# Altium PCB PCB1.PcbDoc
Units mm, origin at the board's own origin, x right, y up, seen from the top; angles counter-clockwise.
Board outline 40 x 40 mm, 2 copper layers (Top Layer, Bottom Layer); 43 components, 46 nets, 188 pads, 26 vias.
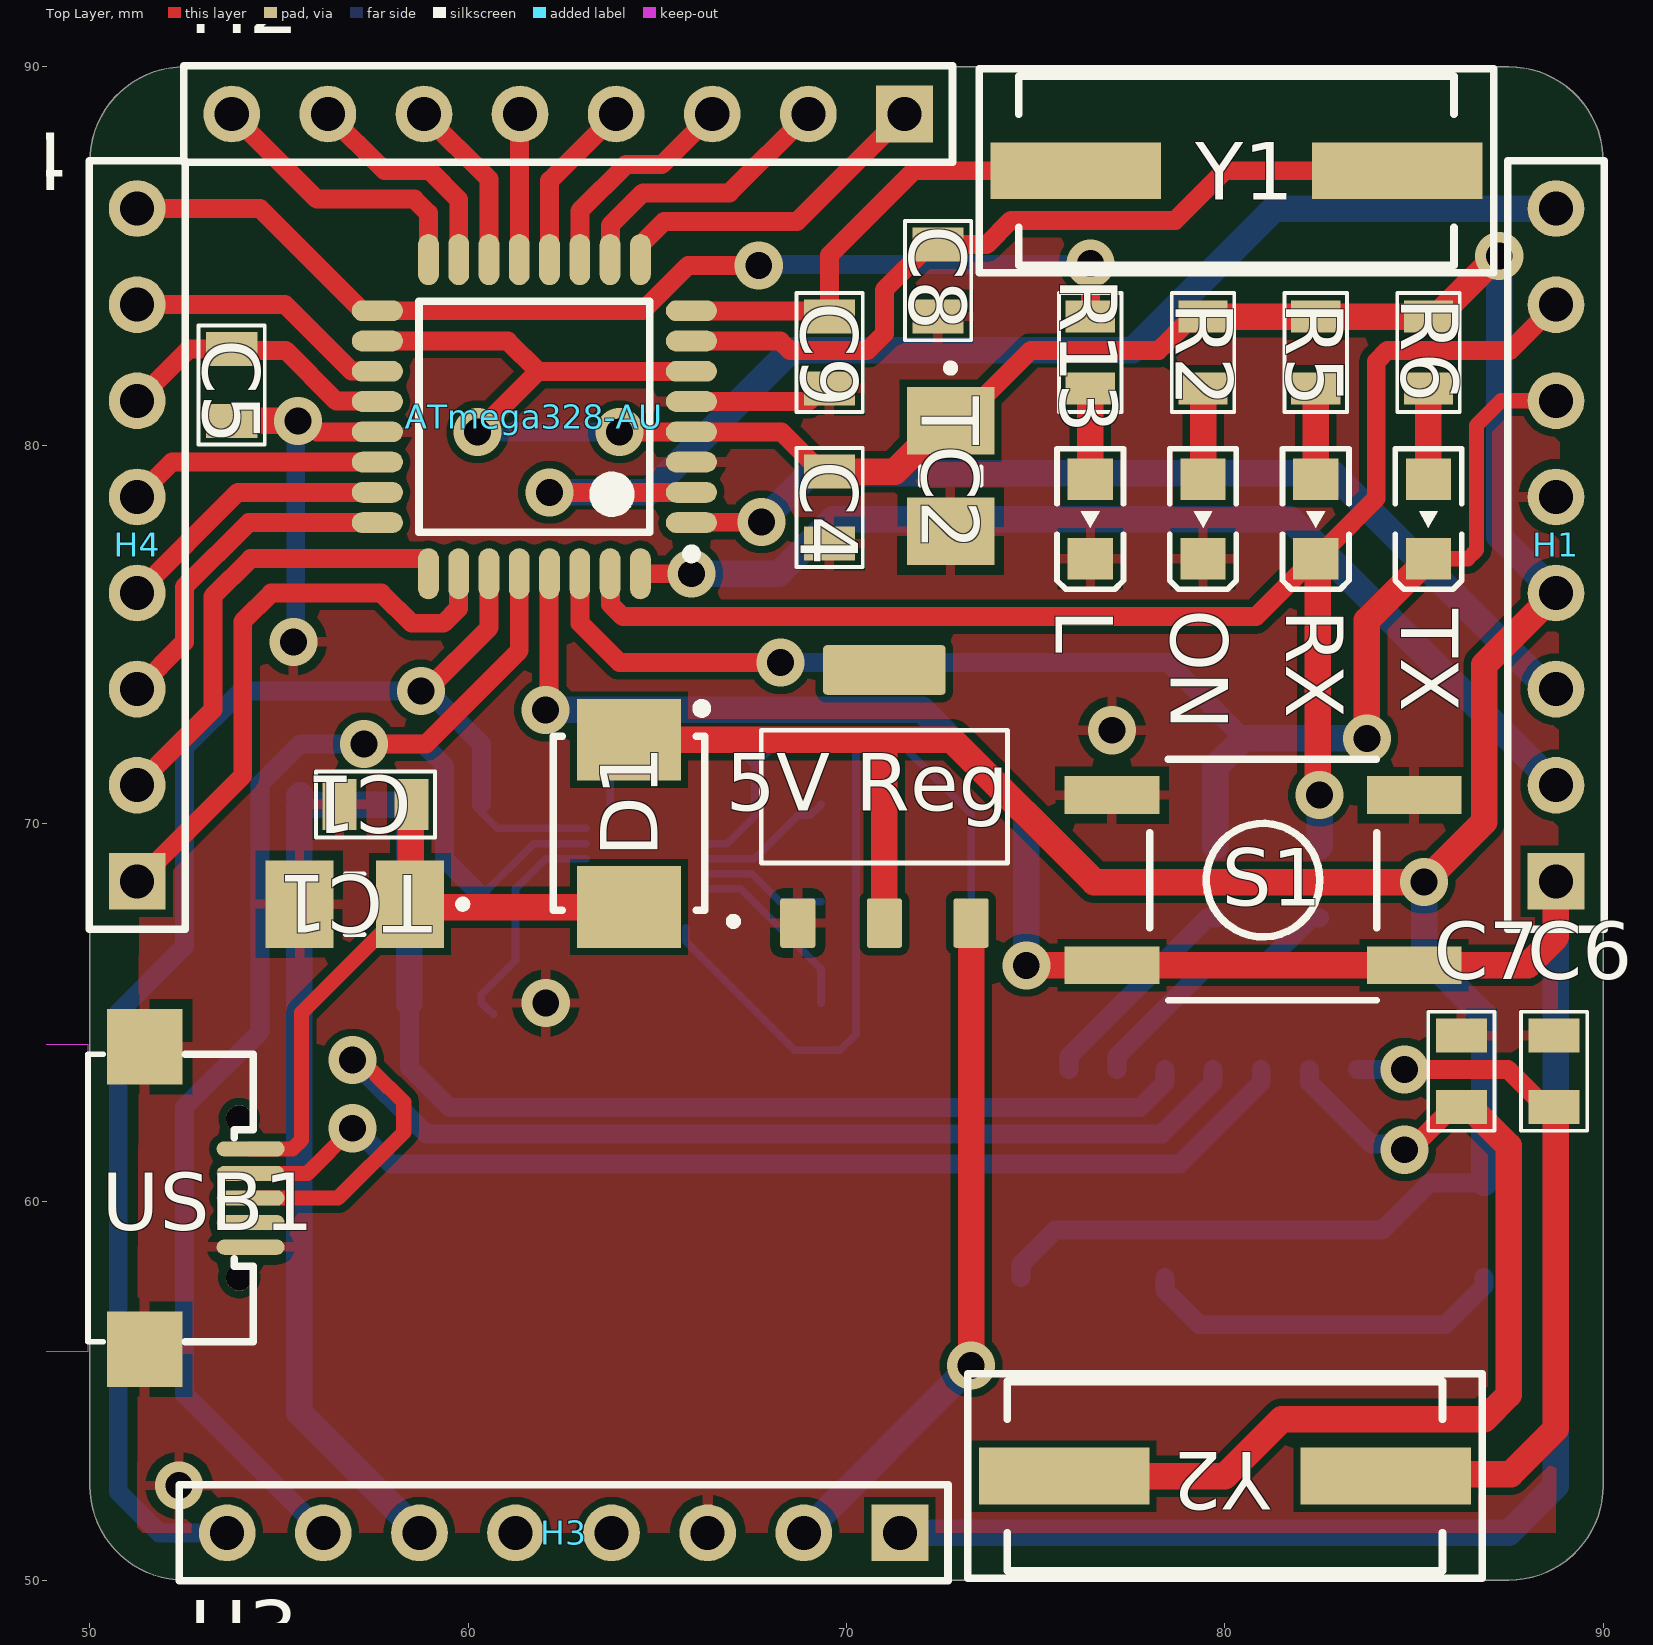
[diagram p0: Top Layer view]
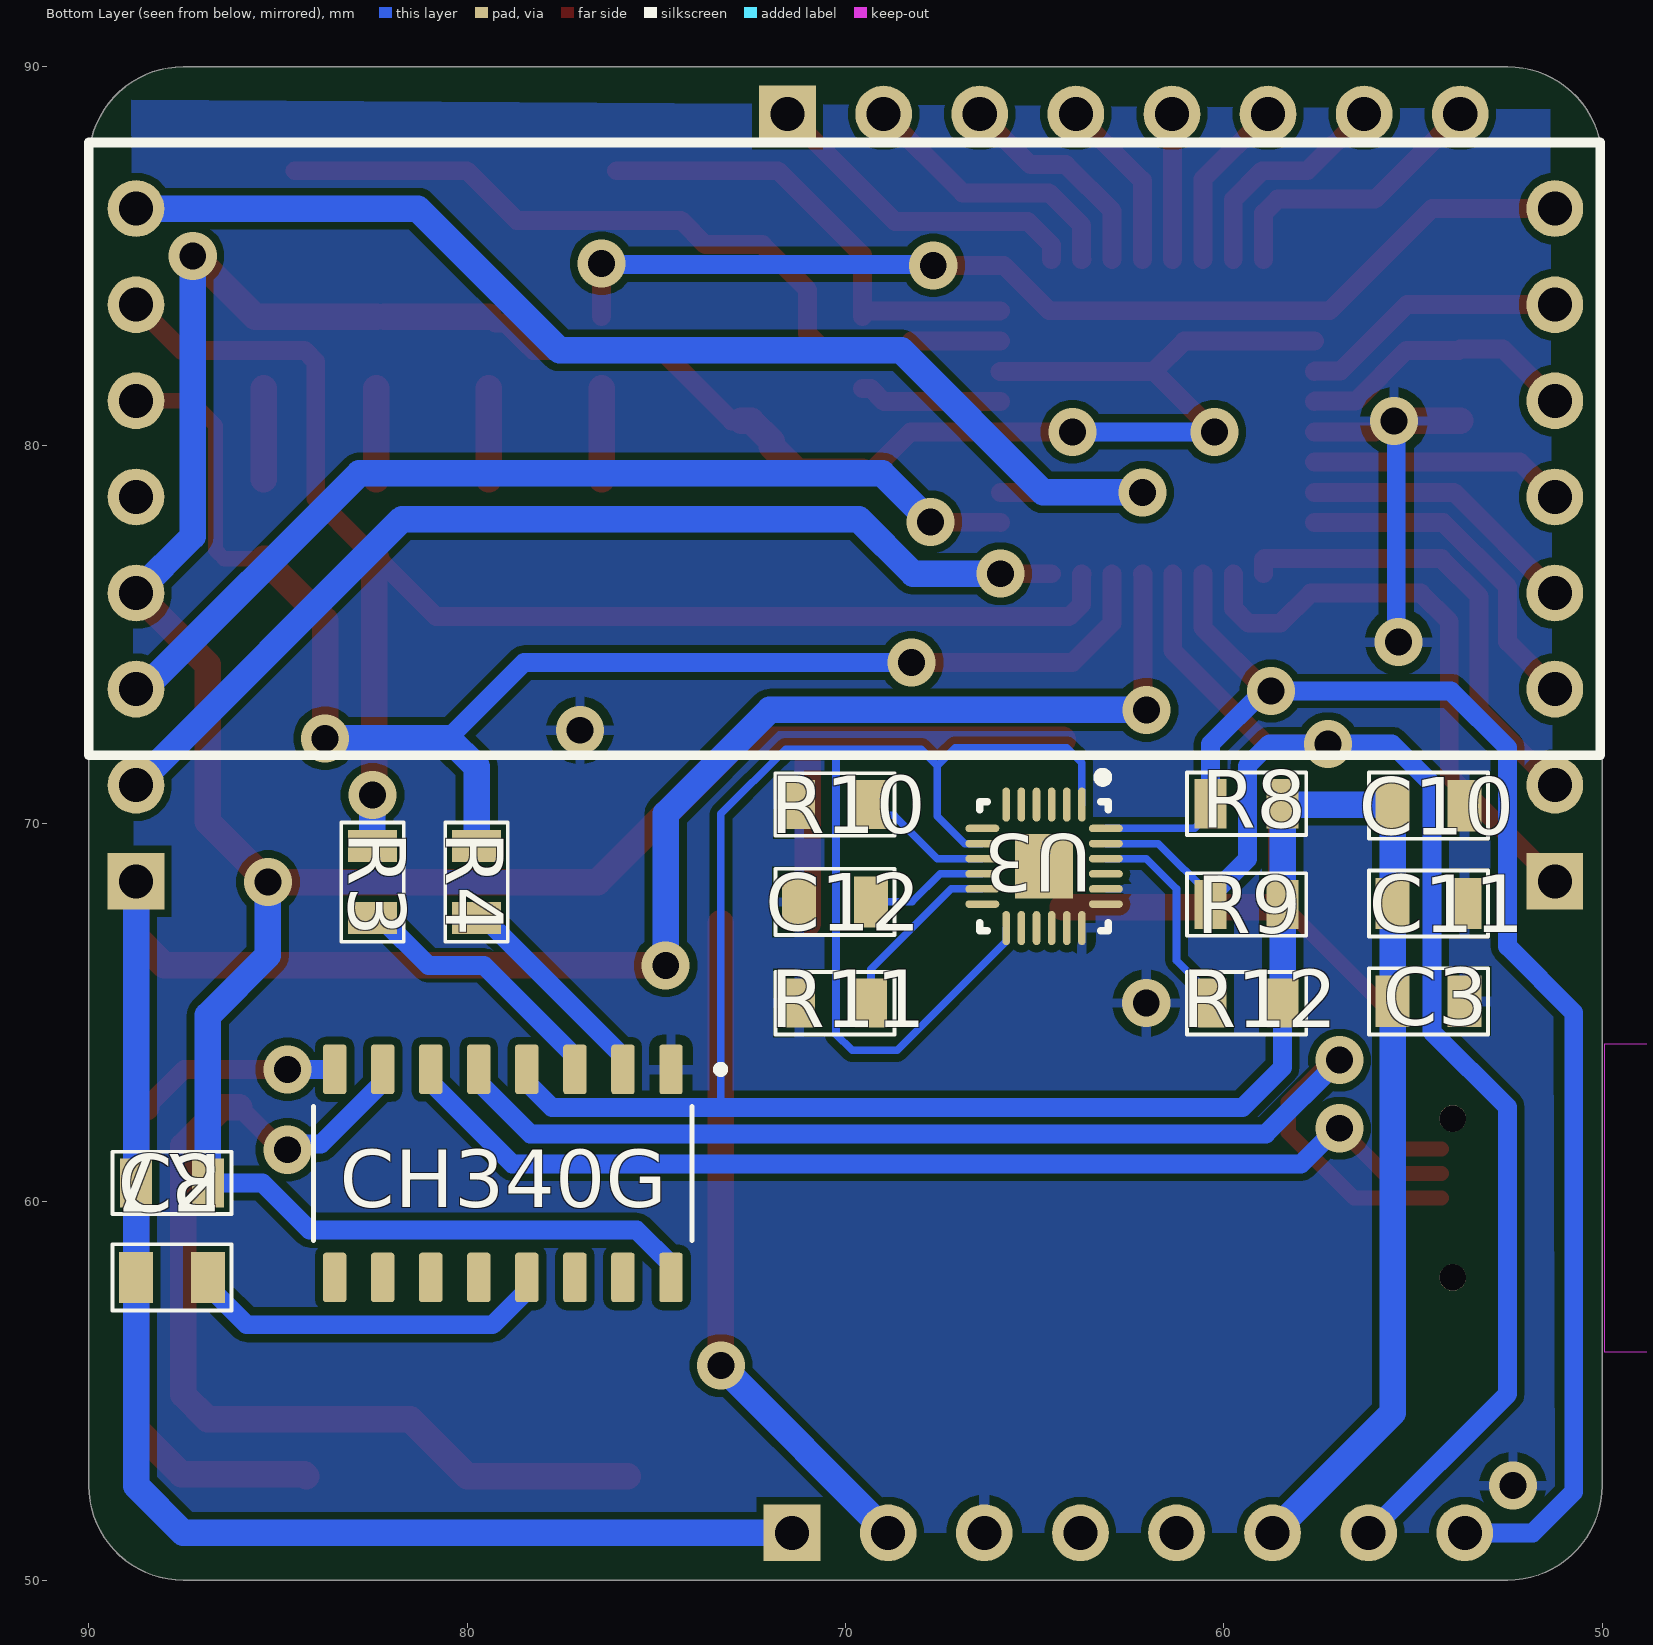
[diagram p1: Bottom Layer view, seen from below]
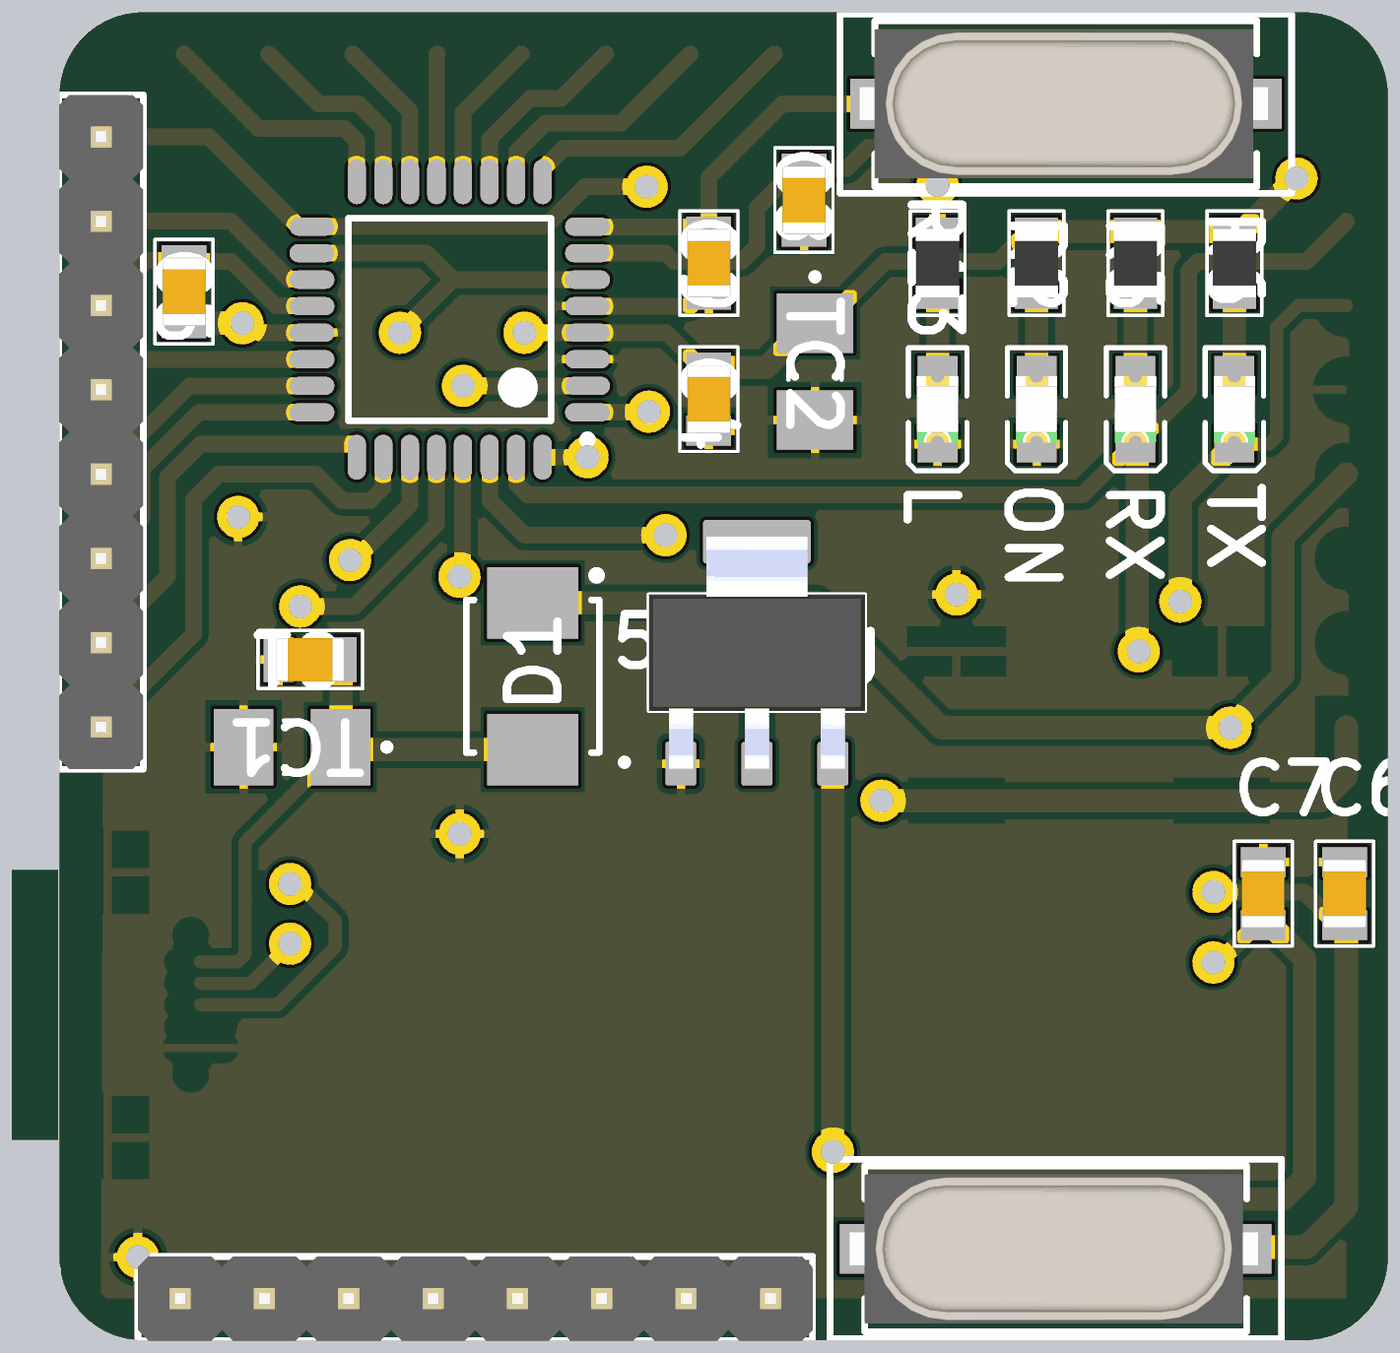
[diagram p2: 3D render of the assembled board from above, using the file's embedded part models]
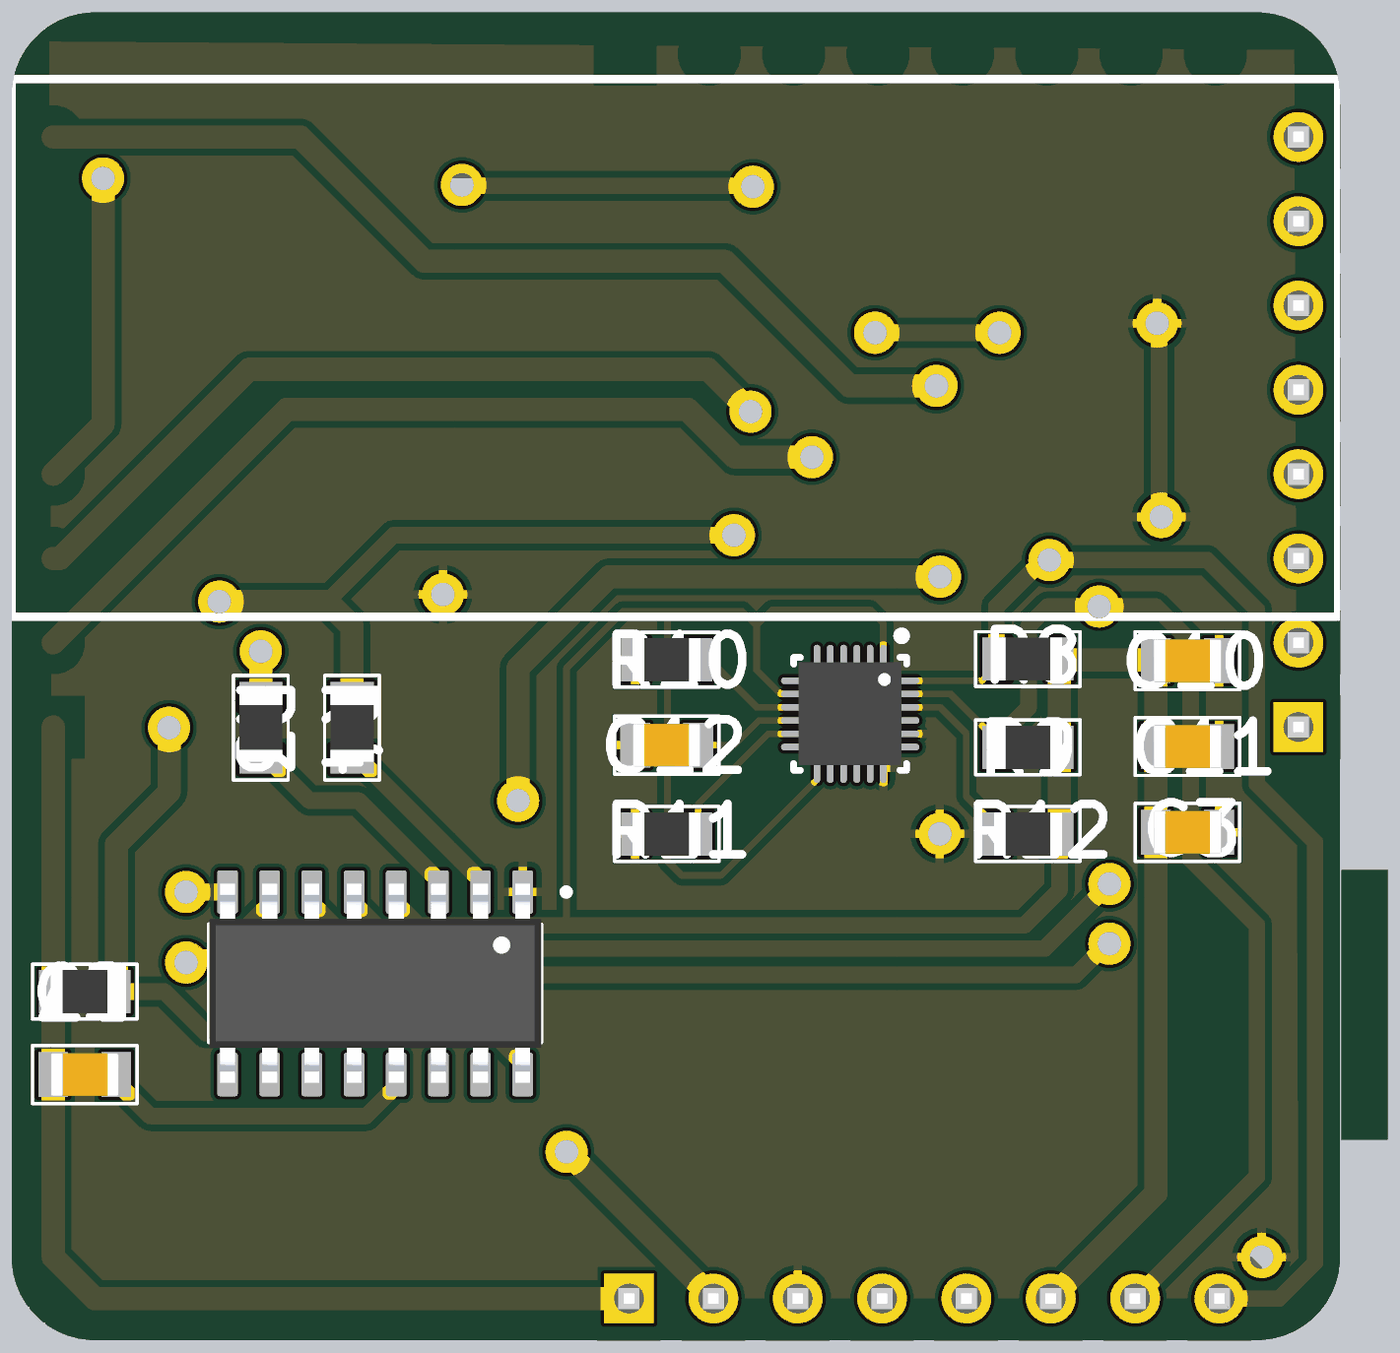
[diagram p3: 3D render of the assembled board from below, using the file's embedded part models]

## Layer stack, top to bottom
Top Solder: solder mask 0.0102, Solder Resist, Dk 3.5
Top Layer: signal copper 0.0356
Dielectric 1: dielectric 0.32, FR-4, Dk 4.8
Bottom Layer: signal copper 0.0356
Bottom Solder: solder mask 0.0102, Solder Resist, Dk 3.5

## Board outline
50,52.5 50,87.5 cw(c52.5,87.5) 52.5,90 87.5,90 cw(c87.5,87.5) 90,87.5 90,52.5 cw(c87.5,52.5) 87.5,50 52.5,50 cw(c52.5,52.5)

## Design rules (kind name [scope] priority, off if disabled: settings)
Clearance [All] p1: gap=0.2 ignorepadtopadclearanceinfootprint=FALSE except(0.1: Arc-SMDPad Track-SMDPad SMDPad-SMDPad)
PolygonConnect [All] p1: connectstyle=Relief reliefconductorwidth=0.254 reliefentries=4 polygonreliefangle="90 Angle" airgapwidth=0.254
RoutingVias [All] p1: holewidth=0.711 width=1.27 viastyle="Through Hole" minholewidth=0.711 minwidth=1.27 maxholewidth=0.711 maxwidth=1.27
SolderMaskExpansion [All] p1: expansion=0.102 istentingtop=FALSE
SupplyNets "Schematic Supply Nets_2" [InNet('3.3V')] p1: voltage=0.000
SupplyNets "Schematic Supply Nets_1" [InNet('GND')] p2: voltage=0.000
SupplyNets "Schematic Supply Nets" [InNet('5V')] p3: voltage=0.000
Width [All] p1: maxlimit=0.7 minlimit=0.2 preferedwidth=0.5
30 further rules are at their usual default settings.

## Components (designator, comment, footprint, x,y, rotation, side; value= is the part's Value field where it differs from the comment)
"5V Reg" "" SOT229P700X180-4N 71,70.71 r0 top
ATmega328-AU "" 32A_L 61.75,80.75 r180 top
C1 "0.1uF" CAP0805 51.236,67.84 r0 top
C2 "0.1uF" CAP0805 81.486,60.66 r0 bottom
C3 "0.1uF" CAP0805 48.276,67.96 r0 bottom
C4 "0.1uF" CAP0805 66.893,84.663 r270 top
C5 "0.1uF" CAP0805 56.41,75.273 r90 top
C6 "22pF" CAP0805 86.04,69.764 r270 top
C7 "22pF" CAP0805 83.59,69.764 r270 top
C8 "22pF" CAP0805 75.078,78.032 r90 top
C9 "22pF" CAP0805 72.213,76.132 r90 top
C10 "0.01uF" CAP0805 48.276,73.128 r0 bottom
C11 "0.1uF" CAP0805 48.276,70.544 r0 bottom
C12 "0.1uF" CAP0805 63.961,70.585 r0 bottom
CH340G "" SOIC127P600X180-16N 79.055,60.75 r270 bottom
D1 "" ONSC-SMB-2-403A-03_V 64.25,70 r270 top
H1 "" "Header 8" 108.816,51.579 r90 top
H2 "" "Header 8" 88.421,108.816 r180 top
H3 "" "Header 8" 88.301,71.316 r180 top
H4 "" "Header 8" 71.316,51.579 r90 top
L "" LED_SMD_0805 76.983,80.762 r90 top
ON "" LED_SMD_0805 79.962,80.762 r90 top
R2 "1k" RES0805 81.734,78.759 r90 top
R3 "1k" RES0805 80.187,64.763 r90 bottom
R4 "1k" RES0805 77.437,64.763 r90 bottom
R5 "330" RES0805 84.714,78.759 r90 top
R6 "330" RES0805 87.693,78.759 r90 top
R7 "1k" RES0805 91.487,58.187 r180 bottom
R8 "10k" RES0805 63.085,68.205 r180 bottom
R9 "10k" RES0805 63.085,65.546 r180 bottom
R10 "10k" RES0805 66.588,72.813 r0 bottom
R11 "10k" RES0805 73.962,62.937 r180 bottom
R12 "10k" RES0805 63.085,62.937 r180 bottom
R13 "1k" RES0805 74.129,86.133 r270 top
RX "" LED_SMD_0805 82.942,80.762 r90 top
S1 "" "Push Button Switch SMD" 109.478,95.805 r180 top
TC1 "4.7u" CAPMP3516X190N 57,67.866 r180 top
TC2 "4.7uF" CAPMP3516X190N 72.75,79.181 r270 top
TX "" LED_SMD_0805 85.921,80.762 r90 top
U3 "MPU-9250" INSE-QFN-24-1700X1540TP_M 64.75,68.868 r270 bottom
USB1 "USB MICRO USB_AB_BM_SHS" "USB MICRO USB_AB_BM_SHS" 99.891,92.002 r180 top
Y1 "16MHz" "Crystal SMD" 71.692,82.701 r0 top
Y2 "12MHz" "Crystal SMD" 71.387,48.201 r0 top

## Footprints (in the part's own frame and the unit in brackets; to place one, negate y for a bottom-side part, rotate by r counter-clockwise, add the part's x,y. Pads: shape width x height; smd on the part's side, far side on the other; paste and mask are expansions set on the pad)
32A_L [mm] "Thin QFP, 32-Leads, Body 7x7mm, Pitch 0.8mm, IPC High Density"
  oval 1.35x0.55 smd: 1(-4.15,2.8) 2(-4.15,2) 3(-4.15,1.2) 4(-4.15,0.4) 5(-4.15,-0.4) 6(-4.15,-1.2) 7(-4.15,-2) 8(-4.15,-2.8) 17(4.15,-2.8) 18(4.15,-2) 19(4.15,-1.2) 20(4.15,-0.4) 21(4.15,0.4) 22(4.15,1.2) 23(4.15,2) 24(4.15,2.8)
  oval 0.55x1.35 smd: 9(-2.8,-4.15) 10(-2,-4.15) 11(-1.2,-4.15) 12(-0.4,-4.15) 13(0.4,-4.15) 14(1.2,-4.15) 15(2,-4.15) 16(2.8,-4.15) 25(2.8,4.15) 26(2,4.15) 27(1.2,4.15) 28(0.4,4.15) 29(-0.4,4.15) 30(-1.2,4.15) 31(-2,4.15) 32(-2.8,4.15)
  silkscreen extent -4.28,-3.05 3.05,3.75, body extent -3.5,-3.5 3.5,3.5, height 1.2
CAP0805 [mm]
  rect 0.9x1.35 smd: 1(5.364,2.66) 2(7.264,2.66)
  silkscreen extent 4.74,1.78 7.89,3.53, body extent 5.29,2.01 7.34,3.31, height 0.5
CAPMP3516X190N [mm]
  rect 1.79x2.31 smd: 1(-1.46,0) 2(1.46,0)
  silkscreen extent -2.96,-0.8 0.24,0.8
"Crystal SMD" [mm]
  rect 4.5x1.5 smd: 1(4.363,4.549) 2(12.863,4.549)
  silkscreen extent 1.81,1.85 15.41,7.25, body extent 2.4,2.3 14.7,6.8, height 5.18
"Header 8" [mm]
  rect 1.5x1.5 hole 0.9: 1(16.891,20.066)
  round 1.5 hole 0.9: 2(19.431,20.066) 3(21.971,20.066) 4(24.511,20.066) 5(27.051,20.066) 6(29.591,20.066) 7(32.131,20.066) 8(34.671,20.066)
  silkscreen extent 15.62,18.8 35.94,21.34, body extent 15.62,18.8 35.94,21.34, height 8.38
INSE-QFN-24-1700X1540TP_M [mm] "QFN, 24-Leads, Body 3.1x3.1mm, Pitch 0.40mm, Thermal Pad 1.54x1.70mm, IPC Low Density"
  oval 0.9x0.2 smd: 1(-1.632,1) 2(-1.632,0.6) 3(-1.632,0.2) 4(-1.632,-0.2) 5(-1.632,-0.6) 6(-1.632,-1) 13(1.632,-1) 14(1.632,-0.6) 15(1.632,-0.2) 16(1.632,0.2) 17(1.632,0.6) 18(1.632,1)
  oval 0.2x0.9 smd: 7(-1,-1.632) 8(-0.6,-1.632) 9(-0.2,-1.632) 10(0.2,-1.632) 11(0.6,-1.632) 12(1,-1.632) 19(1,1.632) 20(0.6,1.632) 21(0.2,1.632) 22(-0.2,1.632) 23(-0.6,1.632) 24(-1,1.632)
  rect 1.7x1.54 smd: 25(0,0)
  silkscreen extent -2.47,-1.7 1.7,1.7, body extent -1.55,-1.55 1.55,1.55, height 1.05
LED_SMD_0805 [mm]
  rect 1.1x1.2 smd: 1(-3.767,0.541) 2(-1.667,0.541)
  silkscreen extent -4.57,-0.34 -0.86,1.42, body extent -3.72,-0.08 -1.72,1.17, height 0.7
ONSC-SMB-2-403A-03_V [mm] "Molded, 2-Leads, Body 4.6x3.95mm"
  rect 2.159x2.743 smd: 1(-2.21,0) 2(2.21,0)
  silkscreen extent -3.16,-2 2.3,2.05, body extent -2.3,-1.97 2.3,1.97, height 2.47
"Push Button Switch SMD" [mm]
  rect 2.5x1 smd: 1(24.478,29.555) 1(32.463,29.555) 2(24.478,25.055) 2(32.463,25.055)
  silkscreen extent 25.47,24.1 31.47,30.48, body extent 23.97,24.3 32.97,30.3, height 5
RES0805 [mm]
  rect 0.85x1.3 smd: 1(2.737,2.313) 2(4.637,2.313)
  silkscreen extent 2.11,1.49 5.26,3.14, body extent 2.66,1.66 4.71,2.96, height 0.5
SOIC127P600X180-16N [mm]
  rrect25% 1.31x0.62 smd: 1(-2.75,4.445) 2(-2.75,3.175) 3(-2.75,1.905) 4(-2.75,0.635) 5(-2.75,-0.635) 6(-2.75,-1.905) 7(-2.75,-3.175) 8(-2.75,-4.445) 9(2.75,-4.445) 10(2.75,-3.175) 11(2.75,-1.905) 12(2.75,-0.635) 13(2.75,0.635) 14(2.75,1.905) 15(2.75,3.175) 16(2.75,4.445)
  silkscreen extent -2.85,-5 1.77,5.85, body extent -3,-5 3,5, height 1.8
SOT229P700X180-4N [mm]
  rrect15% 0.93x1.31 smd: 1(-2.29,-3.345) 2(0,-3.345) 3(2.29,-3.345)
  rrect15% 3.24x1.31 smd: 4(0,3.345)
  silkscreen extent -4.09,-3.4 3.25,1.75, body extent -3.25,-3.5 3.25,3.5, height 1.8
"USB MICRO USB_AB_BM_SHS" [mm]
  oval 1.8x0.4 smd: 1(45.641,30.602) 2(45.641,31.252) 3(45.641,31.902) 4(45.641,32.552) 5(45.641,33.202)
  rect 2x2 smd: 5(48.441,27.902) 5(48.441,35.902)
  round 0.7 hole 0.7: H(45.941,29.802) H(45.941,34.002)
  Keep-Out Layer board cut-out: 49.941,35.966 51.332,35.966 51.332,27.838 49.941,27.838
  silkscreen extent 45.57,28.1 49.94,35.7, body extent 45.26,27.9 51.3,35.9, height 2.75

## Part data
"5V Reg": library part AMS1117-5.0, "1A LOW DROPOUT VOLTAGE REGULATOR", Package="SOT-223 Seeed Technology", Availability="Not in stock", Check_prices=https://www.snapeda.com/parts/AMS1117-5.0/ams/view-part/?ref=eda, MF=ams, MP=AMS1117-5.0, Price=None, SnapEDA_Link=https://www.snapeda.com/parts/AMS1117-5.0/ams/view-part/?ref=snap
ATmega328-AU: library part CMP-0095-00261-2, "8-bit AVR Microcontroller, 32KB Flash, 1KB EEPROM, 2KB SRAM, 32-pin TQFP, Industrial Grade (-40°C to 85°C)", Code_JEDEC=MS-026-ABA, ComponentLink1Description="Manufacturer URL", ComponentLink1URL=http://www.atmel.com/, ComponentLink2Description="ATmega48A/48PA/88A/88PA/168A/168PA/328/328P Datasheet", ComponentLink2URL=http://www.atmel.com/dyn/resources/prod_documents/doc8271.pdf, ComponentLink3Description="ATmega48A/48PA/88A/88PA/168A/168PA/328/328P Summary", ComponentLink3URL=http://www.atmel.com/dyn/resources/prod_documents/8271S.pdf, DatasheetVersion="revD, May-2011", PackageDescription="32-Lead, 7x7x1.0 mm Body, 0.8mm Lead Pitch, Thin Profile Plastic Quad Flat Package (TQFP)", PackageReference=32A, PackageVersion="revC, Oct-2010", RevisionNote="DatasheetVersion & PackageVersion updated. URLs added."
C1 C2 C3 C4 C5 C6 C7 C8 C9 C10 C11 C12: library part CAP0805, "CAP0805"
CH340G: library part CH340G, "USB Interface Integrated Circuit", Package=None, Availability="Not in stock", Check_prices=https://www.snapeda.com/parts/Ch340G/WCH/view-part/?ref=eda, MF=WCH, MP=Ch340G, Price=None, SnapEDA_Link=https://www.snapeda.com/parts/Ch340G/WCH/view-part/?ref=snap
D1: library part CMP-1055-00372-1, "Schottky Power Rectifier, 2-Pin SMB, Pb-Free, Tape and Reel", Manufacturer="On Semiconductor", PartNumber=SS24T3G, ComponentLink1Description="Manufacturer URL", ComponentLink1URL=http://www.onsemi.com/, ComponentLink2Description=Datasheet, ComponentLink2URL=http://www.onsemi.cn/pub_link/Collateral/SS24-D.PDF, ComponentLink3Description="Package Specification", ComponentLink3URL=http://www.onsemi.com/pub_link/Collateral/403A-03.PDF, Configuration=Single, DatasheetVersion="Rev. 4", IFSM Max (A)=75, Mounting Technology="Surface Mount", PackageDescription="2-Pin Small Molded Package, J-Bend Lead, Body 4.33 x 3.625 mm", PackageReference=SMB-2-403A-03, PackageVersion="Rev. J, 07/2012", Packing="Tape and Reel", RoHS=TRUE
H1 H2 H3 H4: library part "Header 8"
L ON RX TX: library part LED_SMD_0805
R2 R3 R4 R5 R6 R7 R8 R9 R10 R11 R12 R13: library part RES0805, "RES0805"
S1: library part "Push Button Switch SMD"
TC1 TC2: library part TAJB475K025RNJ, "4.7 ÂµF Molded Tantalum Capacitors 25 V 1411 (3528 Metric), 1210 1.5Ohm", Package="1411 AVX Corporation", Availability="In Stock", Check_prices=https://www.snapeda.com/parts/TAJB475K025RNJ/AVX/view-part/?ref=eda, MF=AVX, MP=TAJB475K025RNJ, Price=None, Purchase-URL=https://pricing.snapeda.com/search/part/TAJB475K025RNJ/?ref=eda, SnapEDA_Link=https://www.snapeda.com/parts/TAJB475K025RNJ/AVX/view-part/?ref=snap
U3: library part CMP-2100-03657-1, "9-axis MotionTracking device, 2.4 to 3,6 V, -40 to 85 degC, 24-Pin QFN, RoHS, Tape and Reel", Case/Package=QFN, Manufacturer=InvenSense, Max Operating Temperature=85degC, Max Supply Voltage=3.6V, Min Operating Temperature=-40degC, Min Supply Voltage=2.4V, Package Description="24-Pin Quad Flat No-lead Package, Body 3 x 3 mm, Pitch 0.4 mm", Package Quantity=1, Package Reference=QFN-24, Datasheet URL=http://datasheet.octopart.com/MPU-9250-InvenSense-datasheet-21859386.pdf, Datasheet Version="Rev. 1.0, 01/2014", Height=1mm, Length=3.1mm, Manufacturer URL=http://www.invensense.com/, Mount=SurfaceMount, RoHSCompliant=true, Width=3.1mm
Y1 Y2: library part "Crystal SMD", "Crystal SMD"

## Via types
v1: diameter 1.27, hole 0.711, Top Layer to Bottom Layer, 26 vias

## Nets (pads, with @x,y where several pads share a name; then routed paths per layer and width w, separated by ;. In a path a pad name is that pad's centre, name@x,y a point inside that pad or via, vN(x,y) a via of type N, cw(c..) or ccw(c..) an arc to the next point about the centre after c; other vN are vias at no path point)
3.3V: C3.2 C10.2 C11.2 CH340G.4 H3.6 R8.2 R9.2 R12.2 U3.1 U3.8 U3.13 | length 87.6
  Bottom Layer w0.2: U3.1 63.75,71.6 64.15,72 67.098,72 67.568,71.529 ; U3.13 65.75,66.886 68.636,64 69.825,64 70.25,64.425 70.25,71.962 ; U3.8 66.85,69.468 67.568,70.186 67.568,71.529 ; 73.29,62.495 73.29,70.25 71.579,71.962 70.25,71.962 ; 67.568,71.529 68,71.962 70.25,71.962
  Bottom Layer w0.5: R12.2 58.448,63.552 59.505,62.495 73.29,62.495 77.76,62.495 78.42,63.155 CH340G.4
  Bottom Layer w0.7: C10.2 C11.2 C3.2 55.54,54.42 H3.6 ; C10.2@55.54,70.718 C10.2@55.565,70.743 ; C10.2@55.565,70.493 R8.2@58.423,70.493 ; R12.2 R9.2 R8.2@58.448,70.493
5V: "5V Reg.2" ATmega328-AU.4 ATmega328-AU.6 ATmega328-AU.18 C4.1 CH340G.16 D1.1 H1.4 R2.2 R5.2 R6.2 R7.2 TC2.1 | length 108.6
  Top Layer w0.5: ATmega328-AU.18 61.05,82.75 61.85,81.95 ; v1(60.25,80.35) 61.85,81.95 ; v1(64,80.35) ATmega328-AU.4 68.277,80.35 69.328,79.299 C4.1 ; ATmega328-AU.6@65.91,81.94 ATmega328-AU.6 61.85,81.95 ; TC2.1 73.01,80.641 74.869,82.5 78.25,82.5 ; 78.353,82.603 78.971,83.221 79.246,83.221 R2.2
  Top Layer w0.7: D1.1 71,72.21 ; C4.1 71.278,79.299 71.945,79.966 71.945,80.096 72.49,80.641 TC2.1 ; 71,67.366 71,72.21 ; R2.2 R5.2@82.176,83.396 ; R5.2 R6.2 85.605,83.396 87.209,85 v1(87.25,85) ; H1.4 86.85,74.19 86.85,70.038 v1(85.262,68.45) 76.55,68.45 72.79,72.21 71,72.21
  Bottom Layer w0.5: v1(60.25,80.35) v1(64,80.35) v1@63.95,80.3 ; CH340G.16 74.61,58.345 75.515,59.25 84.159,59.25 85.409,60.5 R7.2
  Bottom Layer w0.7: v1(85.262,68.45) 85.262,66.516 86.85,64.928 R7.2 ; v1(87.25,85) 87.25,77.59 H1.4
A0: ATmega328-AU.23 H4.4 | length 7.5
  Top Layer w0.5: H4.4 53.91,78.75 ATmega328-AU.23
A1: ATmega328-AU.24 H4.3 | length 9
  Top Layer w0.5: H4.3 52.5,74.8 52.5,76.25 54.2,77.95 ATmega328-AU.24
A2: ATmega328-AU.25 H4.2 | length 12.3
  Top Layer w0.5: H4.2 53.25,73.01 53.25,76 54.25,77 58.927,77 58.95,76.977 ATmega328-AU.25
A3: ATmega328-AU.26 H4.1 | length 15.5
  Top Layer w0.5: H4.1 54.041,71.261 54.041,75.338 54.793,76.09 57.706,76.09 58.505,75.29 59.35,75.29 59.74,75.681 59.74,76.59 ATmega328-AU.26
A4: ATmega328-AU.27 H3.8 R8.1 U3.24 | length 41.4
  Top Layer w0.5: v1(58.75,73.5) 58.876,73.5 60.55,75.174 ATmega328-AU.27
  Bottom Layer w0.2: R8.1 60.348,70.293 60.773,69.868 U3.24
  Bottom Layer w0.5: H3.8 51.833,51.25 50.75,52.333 50.75,65 52.5,66.75 52.5,72 54,73.5 v1(58.75,73.5) 58.95,73.5 60.348,72.102 R8.1
A5: ATmega328-AU.28 H3.7 R9.1 U3.23 | length 42.3
  Top Layer w0.5: v1(57.25,72.102) 58.887,72.102 61.35,74.566 ATmega328-AU.28
  Bottom Layer w0.2: R9.1 60.348,68.084 61.732,69.468 U3.23
  Bottom Layer w0.5: H3.7 52.5,54.92 52.5,62.5 54.5,64.5 54.5,71.048 55.554,72.102 v1(57.25,72.102) 58.794,72.102 59.377,71.52 59.377,69.055 R9.1@60.348,68.084
A6: ATmega328-AU.19 H4.7 | length 7.1
  Top Layer w0.5: H4.7 55.163,83.71 56.913,81.96 57.59,81.96 ATmega328-AU.19
A7: ATmega328-AU.22 H4.5 | length 6.7
  Top Layer w0.5: H4.5 52.17,79.55 ATmega328-AU.22
AREF: ATmega328-AU.20 C5.2 H4.6 | length 7.5
  Top Layer w0.5: H4.6 52.617,82.537 C5.2 53.785,82.502 55.175,82.502 56.517,81.16 57.59,81.16 ATmega328-AU.20
"D0 / Rx": ATmega328-AU.30 H1.6 R4.2 TX.1 | length 39
  Top Layer w0.4: TX.1 86.417,76.995 86.651,77.229 86.651,80.522 87.299,81.17 H1.6
  Top Layer w0.5: ATmega328-AU.30 62.96,76.59 62.96,75.29 64,74.25 v1(68.25,74.25)
  Top Layer w0.7: v1(83.75,72.25) 83.75,75.365 85.13,76.745 85.13,76.795 85.33,76.995 TX.1
  Bottom Layer w0.5: v1(68.25,74.25) 78.5,74.25 80.5,72.25
  Bottom Layer w0.7: R4.2 79.75,71.5 80.5,72.25 v1(83.75,72.25)
"D1 / Tx": ATmega328-AU.31 H1.7 R3.2 RX.1 | length 38.7
  Top Layer w0.5: ATmega328-AU.31 63.76,76.59 63.76,75.793 64.087,75.465 80.821,75.465 82.351,76.995 RX.1 ; RX.1@82.751,77.295 82.751,77.345 84,78.594 84,82.207 84.293,82.5 87.54,82.5 H1.7
  Top Layer w0.7: RX.1 82.45,76.945 82.45,70.8 v1(82.5,70.75)
  Bottom Layer w0.7: R3.2 v1(82.5,70.75)
D2: ATmega328-AU.32 H1.2 | length 27.7
  Top Layer w0.5: ATmega328-AU.32 v1(65.9,76.6)
  Bottom Layer w0.7: v1(65.9,76.6) 68.207,76.6 69.651,78.044 81.716,78.044 H1.2
D3: ATmega328-AU.1 H1.3 | length 25.7
  Top Layer w0.5: ATmega328-AU.1 65.91,77.96 67.738,77.96 v1(67.75,77.972)
  Bottom Layer w0.7: v1(67.75,77.972) 69.028,79.25 82.85,79.25 88.55,73.55 H1.3
D4: ATmega328-AU.2 H1.8 | length 33.5
  Top Layer w0.5: v1(62.15,78.75) ATmega328-AU.2
  Bottom Layer w0.7: v1(62.15,78.75) 64.773,78.75 68.523,82.5 77.557,82.5 81.307,86.25 H1.8
D5: ATmega328-AU.9 H2.1 | length 8.8
  Top Layer w0.5: ATmega328-AU.9 64.55,85.286 65.177,85.913 68.693,85.913 H2.1
D6: ATmega328-AU.10 H2.2 | length 7.4
  Top Layer w0.5: ATmega328-AU.10 63.76,84.91 63.76,85.806 64.616,86.663 66.903,86.663 H2.2
D7: ATmega328-AU.11 H2.3 | length 5.9
  Top Layer w0.5: ATmega328-AU.11 62.95,86.19 64.173,87.413 65.113,87.413 H2.3
D8: ATmega328-AU.12 H2.4 | length 4.6
  Top Layer w0.5: ATmega328-AU.12 62.15,86.99 H2.4
D9: ATmega328-AU.13 H2.5 | length 3.9
  Top Layer w0.5: ATmega328-AU.13 61.36,84.91 61.36,88.74 H2.5
D10: ATmega328-AU.14 H2.6 | length 4.6
  Top Layer w0.5: H2.6 60.55,87.03 ATmega328-AU.14
"D11 / MOSI": ATmega328-AU.15 H2.7 | length 6
  Top Layer w0.5: H2.7 57.79,87.25 58.99,87.25 59.75,86.49 ATmega328-AU.15
"D12 / MISO": ATmega328-AU.16 H2.8 | length 7.5
  Top Layer w0.5: H2.8 56,86.5 58.58,86.5 58.95,86.13 ATmega328-AU.16
"D13 / SCK": ATmega328-AU.17 H4.8 R13.1 | length 28.2
  Top Layer w0.5: H4.8 54.5,86.25 57.2,83.55 ATmega328-AU.17 64.616,83.55 65.816,84.75 v1(67.68,84.75) ; R13.1 v1(76.442,84.803)
  Bottom Layer w0.5: v1(67.68,84.75) 67.706,84.777 76.415,84.777 v1(76.442,84.803)
GND: "5V Reg.1" ATmega328-AU.3 ATmega328-AU.5 ATmega328-AU.21 C1.1 C3.1 C4.2 C5.1 C6.1 C7.1 C8.1 C9.1 C10.1 C11.1 C12.2 CH340G.1 H1.5 H3.3 L.1 ON.1 R10.2 R11.1 S1.2 TC1.2 TC2.2 U3.18 U3.20 USB1.5 | length 13.7
  Top Layer w0.5: v1(55.506,80.637) 55.714,80.637 56.001,80.35 ATmega328-AU.21 ; ATmega328-AU.5 68.982,81.15 69.328,81.496 C9.1
  Top Layer w0.7: C5.1 v1(55.506,80.637)
  Bottom Layer w0.5: v1(55.379,74.8) 55.442,74.864 55.442,80.573 v1(55.506,80.637)
  other v1: 52.36,52.5 62.05,65.25 77.015,72.463
NetATmega328-AU_7: ATmega328-AU.7 C8.2 Y1.2 | length 21.4
  Top Layer w0.5: ATmega328-AU.7 68.25,82.75 68.5,82.5 70.554,82.5 71,82.946 71,84.103 72.193,85.296 C8.2 73.701,85.296 74.343,85.938 78.688,85.938 80,87.25 Y1.2
NetATmega328-AU_8: ATmega328-AU.8 C9.2 Y1.1 | length 12.8
  Top Layer w0.5: ATmega328-AU.8 65.91,83.54 69.409,83.54 C9.2 69.553,85.025 71.778,87.25 Y1.1
NetC1_2: C1.2 D1.2 TC1.1 USB1.1 | length 17.3
  Top Layer w0.4: USB1.1 55.356,61.4 55.59,61.634 55.59,64.996 TC1.1
  Top Layer w0.7: C1.2 58.48,70.48 58.48,67.886 TC1.1 58.536,67.79 D1.2
NetC2_1: C2.1 CH340G.13 | length 9.8
  Bottom Layer w0.5: CH340G.13 78.42,57.655 79.325,56.75 85.825,56.75 86.85,57.775 C2.1
NetC6_2: C6.2 CH340G.8 Y2.2 | length 19.1
  Top Layer w0.5: v1(84.75,63.5) 87.475,63.5 C6.2@88.475,62.5
  Top Layer w0.7: Y2.2 84.3,52.8 87.55,52.8 88.75,54 88.75,62.4 88.65,62.5 C6.2@88.475,62.5
  Bottom Layer w0.5: CH340G.8 v1(84.75,63.5)
NetC7_2: C7.2 CH340G.7 Y2.1 | length 26.5
  Top Layer w0.5: v1(84.75,61.375) 84.9,61.375 C7.2@86.025,62.5
  Top Layer w0.7: Y2.1 80,52.75 81.5,54.25 86.85,54.25 87.5,54.9 87.5,61.475 86.475,62.5 C7.2 C7.2@86.025,62.5
  Bottom Layer w0.5: CH340G.7 82.23,63.155 83.863,61.522 84.603,61.522 v1(84.75,61.375)
NetC12_1: C12.1 U3.10 | length 3.3
  Bottom Layer w0.2: U3.10 67.498,68.668 68.241,67.925 C12.1
NetCH340G_2: CH340G.2 R4.1 | length 5.7
  Bottom Layer w0.5: CH340G.2 75.88,63.845 79.35,67.315 79.35,67.325 79.525,67.5 R4.1
NetCH340G_3: CH340G.3 R3.1 | length 7.2
  Bottom Layer w0.5: CH340G.3 77.15,63.845 79.555,66.25 81.025,66.25 82.275,67.5 R3.1
NetCH340G_5: CH340G.5 USB1.3 | length 31.8
  Top Layer w0.4: USB1.3 56.562,60.1 58.298,61.835 58.298,62.641 57.928,63.01 57.909,63.01 57.177,63.743 v1(56.941,63.743)
  Bottom Layer w0.5: v1(56.941,63.743) 58.889,61.795 78.33,61.795 79.69,63.155 CH340G.5
NetCH340G_6: CH340G.6 USB1.2 | length 28.8
  Top Layer w0.4: USB1.2 55.748,60.75 v1(56.941,61.943)
  Bottom Layer w0.5: v1(56.941,61.943) 57.014,61.943 57.957,61 78.805,61 80.96,63.155 CH340G.6
NetL_2: L.2 R13.2 | length 2.4
  Top Layer w0.7: L.2 R13.2
NetON_2: ON.2 R2.1 | length 2.4
  Top Layer w0.7: ON.2 R2.1
NetR5_1: R5.1 RX.2 | length 2.4
  Top Layer w0.7: RX.2 R5.1
NetR6_1: R6.1 TX.2 | length 2.4
  Top Layer w0.7: TX.2 R6.1
NetR10_1: R10.1 U3.9 | length 3.5
  Bottom Layer w0.2: U3.9 67.568,69.068 68.717,70.217 69.042,70.217 R10.1
NetR11_2: R11.2 U3.11 | length 4.7
  Bottom Layer w0.2: U3.11 67.207,68.268 69.325,66.15 R11.2
NetR12_1: R12.1 U3.22 | length 6
  Bottom Layer w0.2: R12.1@60.673,64.951 R12.1 60.348,65.475 61.25,66.377 61.25,68.268 62.05,69.068 U3.22
RESET: ATmega328-AU.29 C2.2 H1.1 H3.1 R7.1 S1.1 | length 71.1
  Top Layer w0.5: v1(62.043,73) 62.14,73.097 62.14,76.59 ATmega328-AU.29
  Top Layer w0.7: v1(74.75,66.25) 85,66.25 88,66.25 88.75,67 H1.1
  Bottom Layer w0.7: v1(62.043,73) 72,73 74.75,70.25 v1(74.75,66.25) ; H3.1 87.5,51.25 88.75,52.5 88.75,59.5 88.75,62.25 H1.1
VIN: "5V Reg.3" H3.2 | length 17.9
  Top Layer w0.7: v1(73.29,55.67) 73.29,67.366
  Bottom Layer w0.7: H3.2 v1(73.29,55.67)
pads on no net: "5V Reg.4" CH340G.9 CH340G.10 CH340G.11 CH340G.12 CH340G.14 CH340G.15 H3.4 H3.5 U3.2 U3.3 U3.4 U3.5 U3.6 U3.7 U3.12 U3.14 U3.15 U3.16 U3.17 U3.19 U3.21 U3.25 USB1.4 USB1.H

## Polygon pours and split planes (outlines as drawn)
GND on Top Layer "GND_L01_P000" (solid, remove dead copper, pour order 0): 51.375,88.875 88.875,89.125 88.75,51.25 51.25,51.25
GND on Bottom Layer "GND_L02_P001" (solid, remove dead copper, pour order 1): 51.375,88.875 88.875,89.125 88.75,51.25 51.25,51.25

## Silkscreen, mask and mechanical layers (free items; w line width, h text height)
Bottom Overlay:
  lines w0.254: 50.05,87.997 89.997,87.997 ; 50.05,88 50.05,71.8 90,71.8 90,88
Mechanical 1:
  the board outline again, w0.254

## Text inside footprints (layer, text, board x,y; h text height)
USB1: Mechanical 1 "PCB EDGE" at 49.702,57.687 h0.7 r90